# Altium PCB 9981_air_main_board_PCB.pcbdoc
Units mil, origin at the board's own origin, x right, y up, seen from the top; angles counter-clockwise.
Board outline 4807 x 4078 mil, 2 copper layers (Top Layer, Bottom Layer); 52 components, 78 nets, 246 pads, 144 vias.
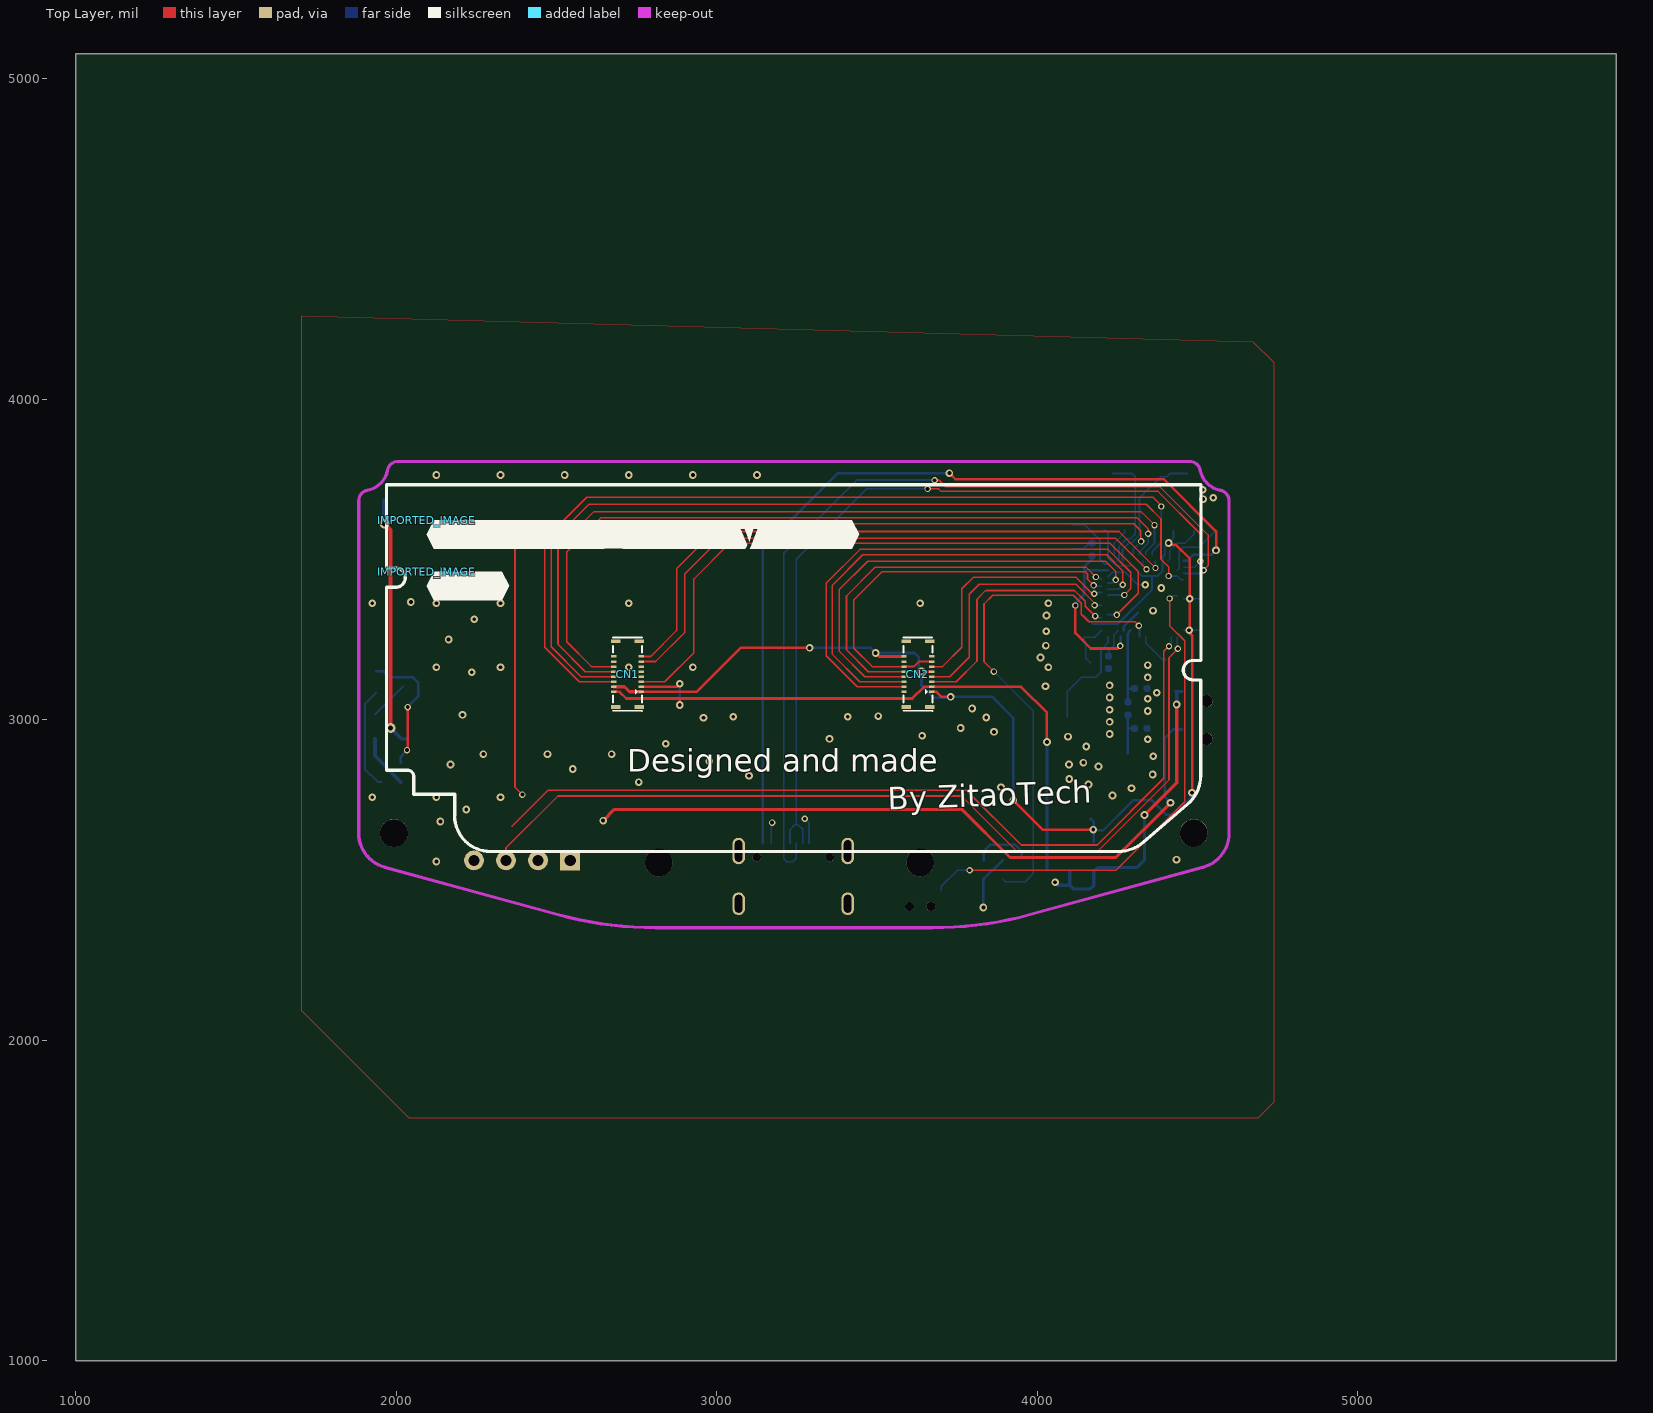
[diagram p0: Top Layer view]
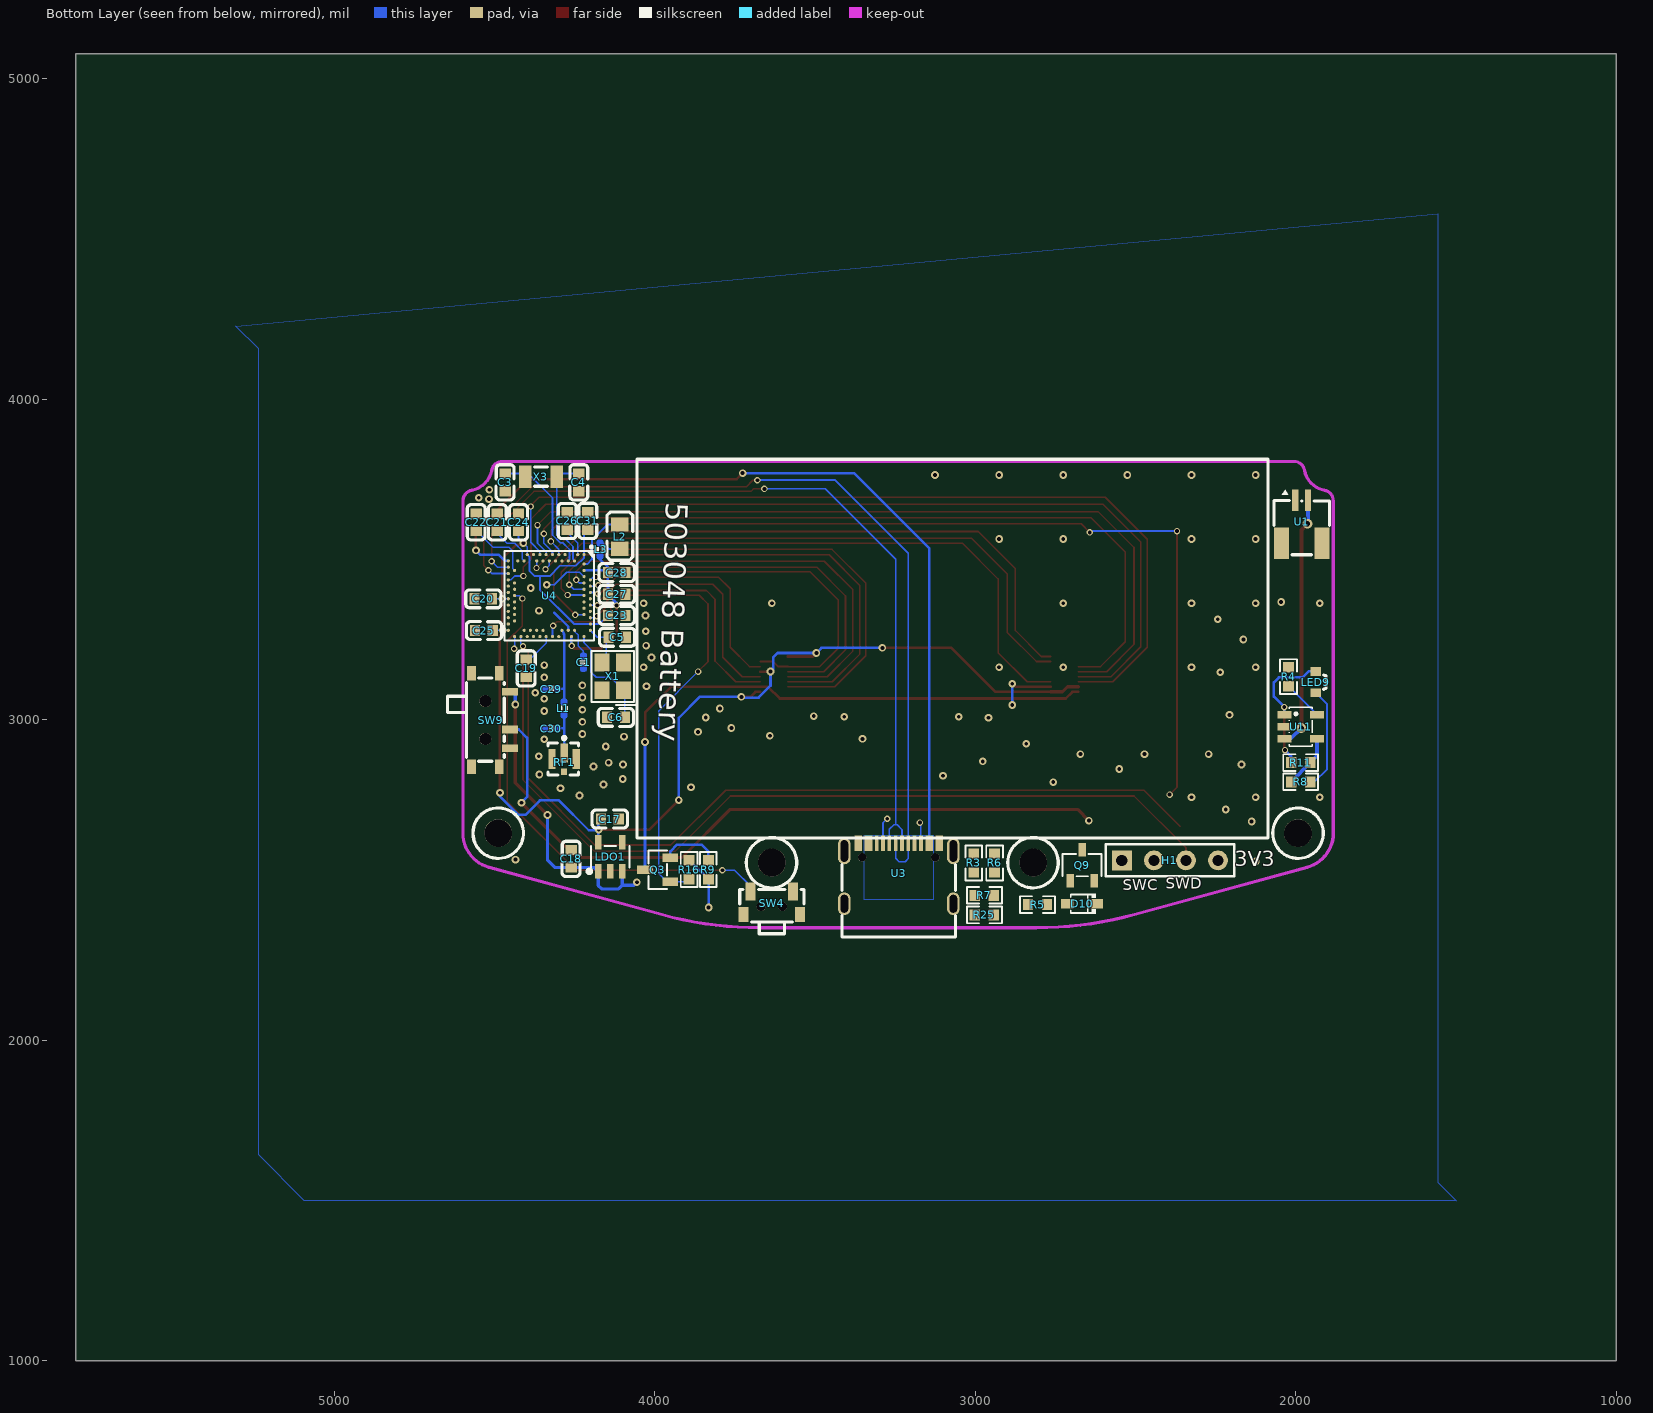
[diagram p1: Bottom Layer view, seen from below]

## Layer stack, top to bottom
Top Layer: signal copper (thickness not stored)
Dielectric: dielectric 12.6, FR-4, Dk 4.8
Bottom Layer: signal copper (thickness not stored)

## Board outline
5807,1000 1000,1000 1000,5078 5807,5078

## Components (designator, comment, footprint, x,y, rotation, side; value= is the part's Value field where it differs from the comment)
C1 "100nF" 0402电容- 4221,3178.96 r180 bottom
C3 "20pF" C0603 4467,3740 r90 bottom
C4 "20pF" C0603 4237,3740 r90 bottom
C5 "12pF" C0603 4117,3256.96 r0 bottom
C6 "12pF" C0603 4121,3006.96 r0 bottom
C17 "10uF" C0603 4140.09,2690 r0 bottom
C18 "10uF" C0603 4261,2566 r270 bottom
C19 "820pF" C0603 4401,3160 r270 bottom
C20 "4.7uF" C0603 4535,3376.96 r180 bottom
C21 "4.7uF" C0603 4491,3616 r270 bottom
C22 "4.7uF" C0603 4557,3616 r270 bottom
C23 "100nF" C0603 4119,3324.96 r180 bottom
C24 "100nF" C0603 4425,3616 r270 bottom
C25 "1uF" C0603 4533,3278 r180 bottom
C26 "100nF" C0603 4273,3620 r270 bottom
C27 "1uF" C0603 4118.39,3390.96 r0 bottom
C28 "47nF" C0603 4119,3458.96 r180 bottom
C29 "1pF" 0402电容- 4323,3094.96 r270 bottom
C30 "1pF" 0402电容- 4323,2970.96 r270 bottom
C31 "100nF" C0603 4209,3620 r90 bottom
CN1 "BM20B(0.8)-16DS-0.4V(51)" CONN-SMD_BM20B-0.8-16DS-0.4V-51 2722.13,3141.95 r90 top
CN2 "BM20B(0.8)-16DS-0.4V(51)" CONN-SMD_BM20B-0.8-16DS-0.4V-51 3627.64,3141.95 r90 top
D10 "BAT60B" SOD-323_L1.8-W1.3-LS2.5-RD 2667,2426 r180 bottom
H1 "HDR-F-2.54_1x4" HDR-F-2.54_1X4 2393,2561 r0 bottom
IMPORTED_IMAGE "IMPORTED_IMAGE" IMPORTED_IMAGE 2095.98,3622 r0 top
IMPORTED_IMAGE "IMPORTED_IMAGE" IMPORTED_IMAGE 2095.97,3462 r0 top
L1 "3.9nH" 0402电阻 4285,3034.96 r0 bottom
L2 "10uH" L0805 4109,3570.96 r90 bottom
L3 "15nH" 0402电阻 4169,3530.96 r180 bottom
LDO1 "ME6211C33M5G-N" SOT-23-5_L3.0-W1.7-P0.95-LS2.8-BL 4139,2572 r0 bottom
LED9 "TJ-S1706SW6TGLC2R-A5" LED-SMD_L1.7-W1.1-RD_RED-SIDE 1938,3117.03 r90 bottom
Q3 "AO3400A_C347475" SOT-23-3_L2.9-W1.3-P1.90-LS2.4-BR 3990.98,2532 r0 bottom
Q9 "AO3401_C727156" SOT-23-3_L2.9-W1.6-P1.90-LS2.8-BR 2667,2546 r90 bottom
R3 "2MΩ" R0603 3005,2553 r270 bottom
R4 "5.1kΩ" R0603 2023,3134 r270 bottom
R5 "10kΩ" R0603 2806,2423 r180 bottom
R6 "820kΩ" R0603 2940,2553 r270 bottom
R7 "5.1kΩ" R0603 2972,2452 r180 bottom
R8 "1kΩ" R0603 1985,2806 r0 bottom
R9 "10Ω" R0603 3832.98,2532 r90 bottom
R11 "10kΩ" R0603 1985,2866 r180 bottom
R16 "10kΩ" R0603 3893,2532 r270 bottom
R25 "5.1kΩ" R0603 2972,2391 r180 bottom
RF1 "BWIPX-4-001E" IPEX-SMD_BWIPX-4-001E 4283,2866.96 r180 bottom
SW4 "GT-TC018A-H0375-L1" SW-SMD_L4.7-W3.5-P3.35-EH 3634.97,2428.05 r180 bottom
SW9 "MSK12CO2-BDM" SW-SMD_MSK12CO2-BDM 4511.7,2998.91 r90 bottom
U1 "WAFER-SH1.0-2PWB" CONN-SMD_2P-P1.00_XUNPU_WAFER-SH1.0-2PWB 1982,3617 r0 bottom
U3 "GT-USB-7010ASV" USB-C-SMD_G-SWITCH_GT-USB-7010ASV 3238.76,2520.09 r0 bottom
U4 "NRF52840_dzt" NRF52840_DZT 4329,3390.96 r90 bottom
U11 "TP4054" SOT-23-5_L3.0-W1.7-P0.95-LS2.8-BR 1985,2978 r180 bottom
X1 "32MHz" CRYSTAL-SMD_4P-L3.2-W2.5-BL 4131,3134.96 r270 bottom
X3 "32.768kHz" FC-135R_L3.2-W1.5 4355,3758 r0 bottom

## Footprints (in the part's own frame and the unit in brackets; to place one, negate y for a bottom-side part, rotate by r counter-clockwise, add the part's x,y. Pads: shape width x height; smd on the part's side, far side on the other; paste and mask are expansions set on the pad)
0402电容- [mil]
  Top Layer region: 8,15 6.53,11.46 3,10 -7,10 -10.54,11.46 -12,15 -12,25 -10.54,28.53 -7,30 3,30 6.53,28.53 8,25
  Top Layer region: 8,-25 6.53,-28.54 3,-30 -7,-30 -10.54,-28.54 -12,-25 -12,-15 -10.54,-11.47 -7,-10 3,-10 6.53,-11.47 8,-15
  silkscreen extent -11,-7 7,7
0402电阻 [mil]
  Top Layer region: -12,-15 -10.53,-11.46 -7,-10 3,-10 6.54,-11.46 8,-15 8,-25 6.54,-28.53 3,-30 -7,-30 -10.53,-28.53 -12,-25
  Top Layer region: -12,25 -10.53,28.54 -7,30 3,30 6.54,28.54 8,25 8,15 6.54,11.47 3,10 -7,10 -10.53,11.47 -12,15
  silkscreen extent -12,-6 8,6
C0603 [mm]
  rect 0.8x0.9 smd paste+0 mask+0.051: 1(0.7,0) 2(-0.7,0)
  silkscreen extent -1.39,-0.72 1.41,0.71
CONN-SMD_2P-P1.00_XUNPU_WAFER-SH1.0-2PWB [mm]
  rect 0.5x1.7 smd paste+0 mask+0.05: 1(0.5,-1.7) 2(-0.5,-1.7)
  rect 1.2x2.5 smd paste+0 mask+0.05: 3(-1.6,1.7) 4(1.6,1.7)
  silkscreen extent -2.2,-2.54 2.2,2.6
CONN-SMD_BM20B-0.8-16DS-0.4V-51 [mm]
  rect 0.2x0.42 smd paste+0 mask+0.051: 1(-1.4,-1.09) 2(-1.4,1.09) 3(-1,-1.09) 4(-1,1.09) 5(-0.6,-1.09) 6(-0.6,1.09) 7(-0.2,-1.09) 8(-0.2,1.09) 9(0.2,-1.09) 10(0.2,1.09) 11(0.6,-1.09) 12(0.6,1.09) 13(1,-1.09) 14(1,1.09) 15(1.4,-1.09) 16(1.4,1.09)
  rect 0.3x0.75 smd paste+0 mask+0.051: 17(2.61,0.925) 18(2.61,-0.925) 19(-2.61,-0.925) 20(-2.61,0.925)
  silkscreen extent -2.91,-1.16 2.9,1.16
CRYSTAL-SMD_4P-L3.2-W2.5-BL [mm]
  rect 1.4x1.2 smd paste+0 mask+0.051: 1(1.1,0.85) 2(-1.1,0.85) 3(-1.1,-0.85) 4(1.1,-0.85)
  silkscreen extent -2.03,-1.68 2.26,1.91
FC-135R_L3.2-W1.5 [mm]
  rect 1x1.8 smd paste+0 mask+0.051: 1(1.25,0) 2(-1.25,0)
  silkscreen extent -0.51,-0.76 0.51,0.76
HDR-F-2.54_1X4 [mil]
  rect 62x62 hole 35 paste+0 mask+2: 1(150,0)
  round 62 hole 35 paste+0 mask+2: 2(50,0) 3(-50,0) 4(-150,0)
  silkscreen extent -200,-50 200,50
IMPORTED_IMAGE [mil]
  silkscreen extent 0,-89 1348,0
IPEX-SMD_BWIPX-4-001E [mm]
  rect 0.6x1.5 smd paste+0 mask+0.051: 1(0,0.738)
  rect 0.58x1.58 smd paste+0 mask+0.051: 2(-0.96,0.263) 3(0.96,0.263)
  rect 0.5x0.5 smd paste+0 mask+0.051: 4(0,-0.737)
  silkscreen extent -1.27,-1.01 1.14,2.05
L0805 [mil]
  rect 44.59x54.21 smd paste-3937.01 mask+2: 1(38.05,0) 2(-38.04,0)
  silkscreen extent -73,-40 77,40
LED-SMD_L1.7-W1.1-RD_RED-SIDE [mm]
  rect 0.7x0.8 smd paste+0 mask+0.051: 1(0.847,0) 2(-0.847,0)
  silkscreen extent -0.56,-0.8 0.57,-0.63
NRF52840_DZT [mm]
  round 0.25 smd paste-100 mask+0.051: A8(1.148,-3.25) A10(0.648,-3.25) A12(0.148,-3.25) A14(-0.352,-3.25) A16(-0.852,-3.25) A18(-1.352,-3.25) A20(-1.852,-3.25) A22(-2.352,-3.25) A23(-2.852,-3.25) AA24(-3.352,2.25) AB2(2.648,2.5) AC5(1.898,2.75) AC9(0.898,2.75) AC11(0.398,2.75) AC13(-0.102,2.75) AC15(-0.602,2.75) AC17(-1.102,2.75) AC19(-1.602,2.75) AC21(-2.102,2.75) AC24(-3.352,2.75) AD2(2.648,3.25) AD4(2.148,3.25) AD6(1.648,3.25) AD8(1.148,3.25) AD10(0.648,3.25) AD12(0.148,3.25) AD14(-0.352,3.25) AD16(-0.852,3.25) AD18(-1.352,3.25) AD20(-1.852,3.25) AD22(-2.352,3.25) AD23(-2.852,3.25) B1(3.148,-2.75) B3(2.398,-2.75) B5(1.898,-2.75) B7(1.398,-2.75) B9(0.898,-2.75) B11(0.398,-2.75) B13(-0.102,-2.75) B15(-0.602,-2.75) B17(-1.102,-2.75) B19(-1.602,-2.75) B24(-3.352,-2.75) C1(3.148,-2.25) D2(2.648,-2) D23(-2.852,-2) E24(-3.352,-1.75) F2(2.648,-1.5) F23(-2.852,-1.5) G1(3.148,-1.25) H2(2.648,-1) H23(-2.852,-1) J1(3.148,-0.75) J24(-3.352,-0.75) K2(2.648,-0.5) L1(3.148,-0.25) L24(-3.352,-0.25) M2(2.648,0) N1(3.148,0.25) N24(-3.352,0.25) P2(2.648,0.5) P23(-2.852,0.5) R1(3.148,0.75) R24(-3.352,0.75) T2(2.648,1) T23(-2.852,1) U1(3.148,1.25) U24(-3.352,1.25) V23(-2.852,1.5) W1(3.148,1.75) W24(-3.352,1.75) Y2(2.648,2) Y23(-2.852,2)
  silkscreen extent -3.65,-3.55 3.85,3.55
R0603 [mil]
  rect 31.75x34.02 smd paste-3937.01 mask+2: 1(29.65,0) 2(-29.66,0)
  silkscreen extent -55,-26 55,26
SOD-323_L1.8-W1.3-LS2.5-RD [mm]
  rect 1x0.75 smd paste+0 mask+0.051: 1(1.173,0) 2(-1.173,0)
  silkscreen extent -0.9,-0.8 1.08,0.8
SOT-23-3_L2.9-W1.3-P1.90-LS2.4-BR [mm]
  rect 1.25x0.7 smd paste+0 mask+0.051: 1(-1,0.95) 2(-1,-0.95) 3(1,0)
  silkscreen extent -0.73,-1.53 0.73,1.53
SOT-23-3_L2.9-W1.6-P1.90-LS2.8-BR [mm]
  rect 1.07x0.6 smd paste+0 mask+0.051: 1(-1.235,0.95) 2(-1.235,-0.95) 3(1.235,0)
  silkscreen extent -0.88,-1.54 0.88,1.54
SOT-23-5_L3.0-W1.7-P0.95-LS2.8-BL [mm]
  rect 0.49x1.157 smd paste+0 mask+0.051: 1(0.95,1.154) 2(0,1.154) 3(-0.95,1.154)
  rect 0.49x1.175 smd paste+0 mask+0.051: 4(-0.95,-1.154) 5(0.95,-1.154)
  silkscreen extent -1.53,-0.85 1.8,1.29
SOT-23-5_L3.0-W1.7-P0.95-LS2.8-BR [mm]
  rect 1.1x0.6 smd paste+0 mask+0.051: 1(-1.3,0.95) 2(-1.3,0) 3(-1.3,-0.95) 4(1.3,-0.95) 5(1.3,0.95)
  silkscreen extent -0.9,-1.55 0.9,1.55
SW-SMD_L4.7-W3.5-P3.35-EH [mm]
  rect 0.8x1.4 smd paste+0 mask+0.051: 1(1.675,0.918) 2(-1.675,0.918)
  rect 0.8x1.2 smd paste+0 mask+0.051: 3(2.25,-0.917) 4(-2.25,-0.917)
  round 0.7 hole 0.7 unplated paste+0: ""(-0.85,-0.282) ""(0.85,-0.282)
  silkscreen extent -2.54,-2.43 2.54,1.07
SW-SMD_MSK12CO2-BDM [mm]
  rect 0.6x1.3 smd paste+0 mask+0.051: 1(-2.25,-1.525) 2(-0.75,-1.525) 3(2.25,-1.525)
  rect 1.15x0.7 smd paste+0 mask+0.051: 4(-3.7,1.525) 4(-3.7,-0.675) 4(3.7,-0.675) 4(3.7,1.525)
  round 0.95 hole 0.95 unplated paste+0: ""(-1.5,0.425) ""(1.5,0.425)
  silkscreen extent -3.27,-1.08 3.33,3.42
USB-C-SMD_G-SWITCH_GT-USB-7010ASV [mm]
  oval 1x2.1 hole 0.6 slot 1.7 at 90 deg paste+0 mask+0.05: 1(4.32,-1.78) 2(-4.32,-1.78)
  oval 1x1.8 hole 0.6 slot 1.4 at 90 deg paste+0 mask+0.05: 3(-4.32,2.4) 4(4.32,2.4)
  rect 0.6x1.24 smd paste-100 mask+0.05: A1B12(3.2,-2.4) A4B9(2.4,-2.4) B1A12(-3.2,-2.4) B4A9(-2.4,-2.4)
  rect 0.3x1.24 smd paste-100 mask+0.05: A5(1.25,-2.4) A6(0.25,-2.4) A7(-0.25,-2.4) A8(-1.25,-2.4) B5(-1.75,-2.4) B6(-0.75,-2.4) B7(0.75,-2.4) B8(1.75,-2.4)
  round 0.65 hole 0.65 unplated paste+0: ""(-2.89,-1.28) ""(2.9,-1.28)
  silkscreen extent -4.5,-0.69 4.5,5.03

## Free pads (board coordinates)
  round 86.61 hole 86.61 unplated paste+0: ""(1993.24,2646) ""(1993.24,2646) ""(2819.14,2554.03) ""(3634.97,2554.03) ""(4488.39,2645.99) ""(4488.39,2646)

## Via types
v1: diameter 24, hole 12, Top Layer to Bottom Layer, tented both sides, 107 vias
v2: diameter 20, hole 12, Top Layer to Bottom Layer, tented both sides, 35 vias
v3: diameter 30, hole 16, Top Layer to Bottom Layer, tented both sides, 2 vias

## Nets (pads, with @x,y where several pads share a name; then routed paths per layer and width w, separated by ;. In a path a pad name is that pad's centre, name@x,y a point inside that pad or via, vN(x,y) a via of type N, cw(c..) or ccw(c..) an arc to the next point about the centre after c; other vN are vias at no path point)
1V8: CN1.9
2V8: CN1.11
AI2: R3.2 R6.1 U4.J1 | length 3315.7
  Top Layer w5: v2(2371,3588) 2371,2789 v2(2394,2766) ; v2(2643,3584) 2670,3611 4301,3611 ; 3946,3611 4301,3611 ; v2@4324,3554 v2(4324,3556) ; v2@4328,3555 4327,3556 v2(4324,3556) ; 4301,3611 4323,3589 ; 4301,3611 4323,3589 ; v2@4323,3557 v2(4324,3556) ; v2@4323,3557 4323,3589 ; v2@4323,3557 4323,3589 ; v2@4323,3557 v2(4324,3556)
  Bottom Layer w5: U4.J1 4299.47,3531.47 v2(4324,3556)
  Bottom Layer w6: v2(2371,3588) 2640,3588 v2@2643,3585
AI3: U4.K2
CN2_2: CN2.2
COL0: CN1.10 U4.N1 | length 2538.8
  Top Layer w5: CN1.10 2590.18,3149.82 2505,3235 2505,3537 2616,3648 4325,3648 v2(4366,3607)
  Bottom Layer w5: U4.N1 4338.8,3522.8 4366,3550 v2(4366,3607)
COL1: CN1.8 U4.AD8 | length 3114.4
  Top Layer w5: CN1.8 2576.93,3134.07 2484,3227 2484,3554 2602,3672 3905,3672 ; 4249,3672 3905,3672 ; v2(4410,3448) 4410,3476 4386,3500 4386,3626 4340,3672 3905,3672
  Bottom Layer w5: v2(4410,3448) 4437,3448 4448.83,3436.17 U4.AD8
COL2: CN1.6 U4.R1 | length 2749.7
  Top Layer w5: CN1.6 2571.7,3118.3 2464,3226 2464,3563 2595,3694 4361,3694 4387,3668 v2(4387,3665)
  Bottom Layer w5: U4.R1 4358.53,3524.53 4387,3553 v2(4387,3665)
COL3: CN1.15 U4.T2 | length 1948.2
  Top Layer w5: CN1.15 2794.07,3197.07 2875,3278 2875,3471 2991,3587 4255,3587 v2(4369,3473)
  Bottom Layer w5: U4.T2 4368.37,3473.63 v2(4369,3473)
COL4: CN1.5 U4.B19 | length 2090.4
  Top Layer w5: CN1.5 2838.3,3118.3 2929,3209 2929,3439 3040,3550 4227,3550 4315,3462 4315,3394 v2(4248,3327)
  Bottom Layer w5: U4.B19 4221.6,3327 v2(4248,3327)
COL5: CN2.12 CN2.13 U4.A10 | length 1261.6
  Top Layer w5: CN2.12 3485.43,3165.57 3428,3223 3428,3373 3517,3462 4150,3462 4157,3455 4157,3438 v2(4176,3419)
  Top Layer w6: CN2.12 3614.57,3165.57 3630.32,3181.32 CN2.13
  Bottom Layer w5: v2(4176,3419) 4178.51,3416.49 U4.A10
COL6: CN2.10 U4.A8 | length 1225.8
  Top Layer w5: CN2.10 3473.18,3149.82 3405,3218 3405,3386 3495,3476 4152,3476 v2(4183,3445)
  Bottom Layer w5: v2(4183,3445) 4192.22,3445 U4.A8
COL7: CN2.8 U4.B9 | length 1394.2
  Top Layer w5: CN2.8 3461.93,3134.07 3382,3214 3382,3405 3471,3494 4213,3494 4245,3462 v2(4245,3436)
  Bottom Layer w5: U4.B9 4235.33,3426.33 v2(4245,3436)
COL8: CN2.6 U4.B11 | length 1536.3
  Top Layer w5: CN2.6 3446.7,3118.3 3360,3205 3360,3418 3456,3514 4217,3514 4267,3464 v2(4267,3421)
  Bottom Layer w5: U4.B11 4252.64,3406.64 v2(4267,3421)
COL9: CN2.4 U4.B13 | length 1663.9
  Top Layer w5: CN2.4 3438.4,3102.6 3342,3199 3342,3426 3447,3531 4221,3531 4292,3460 4292,3409 v2(4272,3389)
  Bottom Layer w5: U4.B13 4222.77,3389 v2(4272,3389)
DCC: L2.1 U4.B3 | length 197.5
  Bottom Layer w6: L2.1 4146,3609 4196,3559 4196,3500 4210.62,3485.38 U4.B3
DCCH: U4.AB2
DEC2: U4.A18
DEC6: C27.1 C28.2 U4.B5 U4.E24 | length 531.8
  Top Layer w8: v2(4119,3356) 4119,3270 4167,3222 4251,3222 v2(4259,3230)
  Bottom Layer w8: v2(4119,3356) 4119,3364.01 C27.1 ; C27.1 C28.2 ; 4171,3511 4171,3500 4146.6,3475.6 C28.2 ; U4.B5 4153.3,3465.7 C28.2 ; v2(4259,3230) 4260.1,3231.1 U4.E24
DECUSB: C22.1 U4.AC5 | length 202.5
  Bottom Layer w5: U4.AC5 4443,3471.4 4443,3526 4455,3538 4505,3538 4555.44,3588.44 C22.1
EXTERN_5V: D10.2 Q9.1 R5.1 R8.1 R11.1 U3.A4B9 U3.B4A9 U4.AD2 U11.4 | length 3696.7
  Top Layer w8: v1(3726,3769) 3745,3750 4395,3750 ; 3836,3750 4395,3750 ; 4395,3750 4558,3587 ; 4395,3750 4558,3587 ; 4558,3587 v1(4558,3528) 4558,3587
  Bottom Layer w8: U3.B4A9 3144.3,3535.3 3378,3769 v1(3726,3769) ; U4.AD2 4467.23,3495.23 4487,3515 4545,3515 v1(4558,3528)
  Bottom Layer w12: U11.4 1933.81,2887.53 R11.1 ; R11.1 R8.1
GND: C3.2 C4.2 C5.2 C6.1 C17.2 C18.2 C19.1 C20.2 C21.2 C22.2 C23.1 C24.2 C25.2 C26.2 C27.2 C28.1 C31.1 CN1.7 CN1.17 CN1.18 CN1.19 CN1.20 CN2.17 CN2.18 CN2.19 CN2.20 H1.1 LDO1.2 R3.1 R4.2 R5.2 R7.1 R9.2 R16.2 R25.1 RF1.2 RF1.3 RF1.4 SW4.1 U1.1 U1.3 U1.4 U3.1 U3.2 U3.3 U3.4 U3.A1B12 U3.B1A12 U4.B7 U4.F23 U11.2 X1.2 X1.4 | length 445
  Bottom Layer w5: v1(4337,3421) 4314,3421 4275,3460 ; 4234.72,3460 U4.B7 4234.72,3460 ; 4234.72,3460 4275,3460 ; 4234.72,3460 4275,3460
  Bottom Layer w8: v1(3832,2414) 3832,2501.36 R9.2 ; R9.2 R16.2 ; U4.F23@4269.95,3278.69 4269.95,3289.95 4314,3334
  other v1: 2125.7,2557.8 4434.73,2563.3 2138,2682 2219,2720 1925.7,2757.8 2125.7,2757.8 2325.7,2757.8 4234.73,2763.3 4294,2786 3887,2789 4160,2798 2757,2805 4100,2815 3101,2825 4360,2829 2551,2846 4191,2854 2170,2860 4099,2860 4144,2866 2977,2870 4362,2886 2272.3,2892.4 2472.3,2892.4 2672.3,2892.4 4153,2916 2841,2925 4345,2939 3352,2940 4096,2947 3641,2950 4226,2955 3865,2962 3761,2974 4226,2993 2959,3006 3841,3007 3052,3009 3409,3009 3504,3011 2207,3015 4345,3027 4226,3031 3797,3035 4345,3065 4226,3069 4373,3084 4026,3104 4226,3107 4345,3132 2236,3148 2125.7,3163.3 2325.7,3163.3 2725.7,3163.3 2925.7,3163.3 4034.73,3163.3 4345,3170 4010,3194 4027,3231 2164,3250 4028,3276 2244,3313 4029,3325 4361,3340 1925.7,3363.3 2125.7,3363.3 2325.7,3363.3 2725.7,3363.3 3634.73,3363.3 4034.73,3363.3 2046,3367 4387,3411 2125.7,3563.3 2325.7,3563.3 2725.7,3563.3 2925.7,3563.3 4517,3688 4549,3692 4516,3717 2125.7,3763.3 2325.7,3763.3 2525.7,3763.3 2725.7,3763.3 2925.7,3763.3 3125.7,3763.3
KEYB2: CN2.11 U4.A12 | length 775.2
  Top Layer w5: CN2.11@3670.5,3165.6 3704.6,3165.6 3765,3226 3765,3408 3801,3444 4121,3444 4172,3393 v2(4178,3393)
  Bottom Layer w5: v2(4178,3393) 4181.8,3396.8 U4.A12
L1_1: RF1.1 | length 139
  Bottom Layer w8: RF1.1 4283,3014.96 ; 4283,2972.96 4303,2972.96
L3_1: L2.2 | length 69.5
  Bottom Layer w6: L2.2 4143.9,3532.9 4162,3551 4171,3551
LEDB_+: C17.1 C20.1 C23.2 C24.1 C25.1 C31.2 CN1.1 CN1.4 CN2.1 CN2.9 CN2.16 LDO1.5 U4.A22 U4.AD14 U4.AD23 U4.B1 U4.W1 | length 4322
  Top Layer w8: CN1.1 2937.8,3086.8 3075,3224 v1(3290,3224) ; v1(3496,3208) 3506.94,3197.06 CN2.16 ; v1(3639,3150) CN2.9@3670.5,3149.8 ; CN2.1 3686.17,3086.83 3702,3071 v1(3730,3071) ; v1(3925,2749) 4017,2657 v1(4175,2657) ; v1(4410,3551) 4415,3546 4432,3546 4476,3502 v1(4476,3377) 4476,3281 v1(4474,3279) 4474,3272 4483,3263 v1(4483,2772)
  Top Layer w10: CN1.4 2712.42,3102.58 2728.17,3086.83 CN1.1
  Bottom Layer w5: C23.2 4173.14,3298.38 U4.A22 ; C31.2 4220.73,3580.71 U4.B1 ; U4.W1 4397.9,3538.9 4425,3566 C24.1@4425,3588.5 ; U4.AD23 4457.26,3279 v1(4474,3279) 4504.44,3279 C25.1 ; U4.AD14 4457.1,3377 v1(4476,3377) C20.1
  Bottom Layer w6: U4.A22@4201.1,3298.4 4251.4,3298.4 4358.6,3405 4358.6,3448 ; U4.B1 4220.73,3505.27 4246,3480 4296,3480 4328,3448 4374,3448 4391,3465 4391,3508.01 U4.W1
  Bottom Layer w8: v1(3290,3224) 3480,3224 v1(3496,3208) 3617,3208 3631,3194 3631,3158 v1(3639,3150) 3639,3106 3676,3069 3728,3069 v1(3730,3071) 3860,3071 3925,3006 v1(3925,2749) ; C17.1 4176.4,2681.25 LDO1.5 ; v1(4175,2657) 4177,2655 4206,2655 4299,2748 4358,2748 4403,2703 4425,2703 4483,2761 v1(4483,2772)
LEDB_D: CN1.2 CN1.3 CN2.3 Q3.3 | length 2107.9
  Top Layer w8: CN1.2 2697.17,3086.83 2718,3066 3610,3066 3646.58,3102.58 CN2.3 3949.42,3102.58 4030.35,3021.65 v1(4030.35,2930) ; CN1.3 2875.58,3102.58 v1(2885,3112) ; v1(2885,3046) 2885,3066
  Bottom Layer w8: v1(2885,3046) v1(2885,3112)
  Bottom Layer w10: Q3.3 v1(4030.35,2930)
P0.09: Q3.1 R16.1 U4.L24 | length 1601.9
  Top Layer w5: v2(3865,3150) 3834,3181 3834,3361 3861,3388 4112,3388 4137,3363 4137,3329 4161,3305 4305,3305 v2(4317,3293)
  Bottom Layer w5: v2(3865,3150) 3988,3027 3988,2520 3962.6,2494.6 Q3.1 3900.74,2494.6 R16.1 ; v2(4317,3293) 4319.16,3290.84 U4.L24
P0.10: U4.J24
P0.12: U4.U1
P0.15: U4.AD10
P0.17: U4.AD12
P0.20: U4.AD16
P0.22: U4.AD18
P0.24: U4.AD20
P0.26: U4.G1
P1.00: U4.AD22
P1.02: U4.W24
P1.04: U4.U24
P1.06: U4.R24
R4_1: R4.1 U11.5 | length 125.9
  Bottom Layer w6: U11.5 R4.1
R7_2: R7.2 U3.A5 | length 81.8
  Bottom Layer w5: v2(3275,2691) 3287.97,2678.03 U3.A5
R8_2: LED9.2 R8.2 | length 321.1
  Bottom Layer w6: LED9.2 1903,3048.7 1903,2846 1943,2806 R8.2
R9_1: Q3.2 R9.1 | length 183.2
  Bottom Layer w8: R9.1 3832.98,2588.98 3854,2610 3931,2610 3951.61,2589.39 Q3.2
R11_2: LED9.1 R11.2 U11.1 | length 441.8
  Top Layer w8: v2(2034,2905) 2034.4,2905 2036.2,2906.8 v2(2036.2,3039.2)
  Bottom Layer w8: LED9.1 1960.6,3150.4 1979,3132 2053,3132 2069,3116 2069,3072 v2(2036.2,3039.2) U11.1 ; R11.2 2014.66,2885.66 v2(2034,2905)
R25_2: R25.2 U3.B5 | length 65.7
  Bottom Layer w5: U3.B5 3169.86,2675.86 v2(3173,2679)
RESET: SW4.2 U4.AC13 | length 1562.7
  Top Layer w5: v2(3789,2530) 4246,2530 4460,2744 4460,3246 4413,3293 v2(4413,3378)
  Bottom Layer w5: SW4.2@3700.9,2467.1 3700.9,2479.9 3751,2530 v2(3789,2530) ; v2(4413,3378) 4421.96,3386.96 U4.AC13
ROW0: CN2.5 U4.A20 | length 805.5
  Top Layer w5: CN2.5 3747.32,3118.32 3812,3183 3812,3376 3839,3403 4116,3403 4150,3369 4150,3354 v2(4181,3323)
  Bottom Layer w5: v2(4181,3323) 4185.9,3318.1 U4.A20@4201.1,3318.1
ROW1: CN1.12 U4.L1 | length 2423.3
  Top Layer w5: CN1.12 2609.43,3165.57 2532,3243 2532,3523 2639,3630 4311,3630 4346,3595 v2(4346,3580)
  Bottom Layer w5: U4.L1 4319.2,3524.2 4346,3551 v2(4346,3580)
ROW2: CN1.13 U4.M2 | length 1913.3
  Top Layer w5: CN1.13 2809.3,3181.3 2901,3273 2901,3455 3012,3566 4244,3566 v2(4341,3469)
  Bottom Layer w5: U4.M2 4329,3481 v2(4341,3469)
ROW3: CN2.7 U4.A16 | length 795.8
  Top Layer w5: CN2.7@3670.5,3134.1 3727.1,3134.1 3788,3195 3788,3391 3819,3422 4121,3422 4179,3364 v2(4179,3357)
  Bottom Layer w5: v2(4179,3357) 4179.43,3357.43 U4.A16@4201.05,3357.43
S$8205: 
S$8209: 
S$8213: 
S$8217: 
S$48758: 
S$52734: 
S$96078: 
SWC: H1.2 U4.AA24 | length 2689.2
  Top Layer w5: 2361,2667 2474,2780 3779,2780 3950,2609 4187,2609 4395,2817 4395,3213 v2(4411,3229)
  Bottom Layer w5: v2(4411,3229) 4417.58,3235.58 U4.AA24
SWD: H1.3 U4.AC24 | length 2797.5
  Top Layer w5: H1.3 2343,2600 2505,2762 3764,2762 3937,2589 4187.99,2589 4411,2812 4411,3193 v2(4439,3221)
  Bottom Layer w5: U4.AC24 4437.27,3222.73 v2(4439,3221)
TP_MOTION2_1V8: CN2.15
TP_SCL_1V8: CN1.16
TP_SDA_1V8: CN1.14
TPBLK_LEDK2: CN2.14
U4_C1: C26.1 U4.C1 | length 91
  Bottom Layer w5: U4.C1 4240.4,3551.4 4273,3584 C26.1
U4_D23: U4.D23 | length 91
  Bottom Layer w5: 4223,3199 4223,3214 4239,3230 4239,3264 4250.3,3275.3 U4.D23
U4_H23: U4.H23 | length 237.5
  Bottom Layer w8: 4283,3062.96 4283,3262.66 ; 4283,3096.96 4303,3096.96 ; 4283,3262.68 cw(c4305.64,3262.68) U4.H23
U4_N24: C19.2 U4.N24 | length 103.4
  Bottom Layer w5: U4.N24 4338.8,3239.2 4390.4,3187.6 C19.2
USB_D+: U3.A6 U3.B6 U4.AD6 | length 2718.3
  Top Layer w5: v2(3680,3747) 3694,3747 3715,3726 4383,3726 4533,3576 4533,3480 v2(4519,3466)
  Bottom Layer w5: U3.B6 3209.2,2566.8 3219,2557 3238,2557 3248.6,2567.6 U3.A6 ; U4.AD6 4508.86,3455.86 v2(4519,3466)
  Bottom Layer w6: U3.B6 3209.23,3519.23 3437,3747 v2(3680,3747)
USB_D-: U3.A7 U3.B7 U4.AD4 | length 2520.8
  Top Layer w5: v2(3658,3720) 3692,3720 3700,3712 4377,3712 4509,3580 v2(4509,3494)
  Bottom Layer w5: U3.A7 3228.9,2656.9 3244,2672 3254,2672 3268.3,2657.7 U3.B7 ; 3247.99,2672 3247.99,3500 3468,3720 v2(3658,3720) ; U4.AD4 4490.54,3475.54 v2(4509,3494)
VBAT: Q9.3 R6.2 U1.2 U11.3 | length 785.5
  Top Layer w12: v3(1964,3611) 1983,3592 v3(1983,2974)
  Bottom Layer w12: U1.2 1962.31,3612.69 v3(1964,3611) ; v3(1983,2974) 2016.4,2940.6 U11.3
VDDH: C21.1 U4.Y2 | length 141
  Bottom Layer w5: U4.Y2 4413,3500.5 4413,3526 4437,3550 4461,3550 4489,3578 C21.1@4489,3588.5
VSYS: D10.1 Q9.2 SW9.2 | length 2191.5
  Top Layer w10: v1(2646,2685) 2681,2720 3765,2720 3915,2570 4245,2570 v1(4416,2741)
  Bottom Layer w8: v1(4416,2741) 4398,2759 4398,2943 4424.39,2969.39 SW9.2
VSYS_IN: C18.1 H1.4 LDO1.1 LDO1.3 SW9.3 | length 982
  Top Layer w10: v1(4334.85,2702.84) 4435,2803 v1(4435,3047)
  Bottom Layer w10: v1(4056,2493) 4065.6,2483.4 4101.6,2483.4 ; LDO1.3 4101.6,2483.4 ; C18.1 4310.4,2538.4 4335,2563 v1(4334.85,2702.84) ; C18.1 4188.26,2538.44 LDO1.1 4176.4,2482.4 4166,2472 4113,2472 4101.6,2483.4 ; v1(4435,3047) 4435,3084 4431.5,3087.5 SW9.3
XC1: C6.2 U4.B24 X1.1 | length 331.2
  Bottom Layer w5: C6.2 4093.44,3087.55 4097.54,3091.65 4137.89,3132 4183,3132 4199,3148 4199,3218 4220.73,3239.73 U4.B24
XC2: C5.1 U4.A23 X1.3 | length 152.5
  Bottom Layer w5: C5.1 4179.32,3256.96 U4.A23 ; C5.1 4144.6,3250.4 4151,3244 4151,3191.7 X1.3
XL1: C4.1 U4.D2 X3.2 | length 365.6
  Bottom Layer w5: U4.D2 4255,3499.97 4255,3540 4279,3564 4291,3564 4305.8,3578.8 X3.2
  Bottom Layer w6: C4.1 4296.23,3767.56 X3.2
XL2: C3.1 U4.F2 X3.1 | length 404.3
  Bottom Layer w5: U4.F2@4269.95,3495.23 4266,3499.18 4266,3531 4287,3552 4295,3552 4319,3576 4319,3692 4385,3758 X3.1
  Bottom Layer w6: X3.1 4413.77,3767.56 C3.1
pads on no net: LDO1.4 SW4. SW4.3 SW4.4 SW9. SW9.1 SW9.4 U3. U3.A8 U3.B8 U4.A14 U4.AC9 U4.AC11 U4.AC15 U4.AC17 U4.AC19 U4.AC21 U4.B15 U4.B17 U4.H2 U4.P2 U4.P23 U4.T23 U4.V23 U4.Y23

## Polygon pours and split planes (outlines as drawn)
GND on Top Layer (solid): 1704,4258 1704,2093 2039,1758 4689,1758 4739,1808 4739,4113 4674,4178
EXTERN_5V on Bottom Layer (solid): 3131,2640 3131,2438 3347,2438 3347,2640
GND on Bottom Layer (solid): 1557,4578 1557,1557 1500,1500 5093,1500 5236,1643 5236,4157 5307,4228

## Keep-outs
Keep-Out Layer:
  lines w10: 1883,2646 ccw(c1993.24,2646) 1964.12,2539.68 ; 1883.5,2646.03 ccw(c1993.27,2646.03) 1964.28,2540.16 ; 1883.5,3683.19 cw(c1916.57,3683.19) 1910.78,3715.75 ccw(c1897.28,3791.72) 1973.25,3778.22 cw(c2005.81,3772.43) 2005.81,3805.5 ; 2503.83,2391.86 ccw(c2809.2,3506.81) 2809.2,2350.8 ; 2503.93,2392.35 ccw(c2809.21,3506.97) 2809.21,2351.3 ; 3672.43,2350.8 ccw(c3672.43,3506.81) 3977.8,2391.86 ; 4475.82,3805.5 cw(c4475.82,3772.43) 4508.38,3778.22 ccw(c4584.35,3791.72) 4570.85,3715.74 cw(c4565.06,3683.18) 4598.13,3683.18 ; 4517.51,2539.68 ccw(c4488.39,2646) 4598.63,2646

## Other copper
Top Layer:
  pour cut-out: 4239,3206.96 4319.16,3206.96 4319.16,2925.12 4319,2924.96 4259,2924.96 4239,2924.96
Bottom Layer:
  pour cut-out: 4239,3206.96 4319.16,3206.96 4319.16,2925.12 4319,2924.96 4259,2924.96 4239,2924.96

## Silkscreen, mask and mechanical layers (free items; w line width, h text height)
Top Overlay:
  lines w10: 1970.4,3473.51 1998.27,3473.51 cw(c1998.27,3443.14) 1998.27,3412.77 1970.4,3412.77 1970.4,2842.23 2035.56,2842.23 cw(c2035.56,2822.52) 2055.27,2822.52 2055.27,2767.38 2182.68,2767.38 ; 1970.4,3732.49 4511.27,3732.49 4511.27,3184.88 4486.24,3184.88 ccw(c4486.06,3154.51) 4486.23,3124.14 4510.06,3124.14 4510.06,2825.72 cw(c4391.94,2825.72) 4468.92,2736.14 4330.66,2617.33 cw(c4253.68,2706.91) 4253.68,2588.8 2293.93,2588.8
  lines w10 net S$48758: 2182.67,2700.05 ccw(c2293.93,2700.05) 2293.93,2588.8 ; 2182.68,2700.05 2182.68,2767.38
  lines w10 net S$52734: 1970.4,3473.51 1970.4,3732.49
  text "Designed and made" at 2721,2814 h120
  text "By ZitaoTech" at 3536,2696 h120 r2
Bottom Overlay:
  circle w10: c1993.24,2646 r78.74
  circle w10: c4488.39,2645.99 r78.74
  circle w10: c3636,2553.94 r78.74
  circle w10: c2820.17,2553.94 r78.74
  lines w10 net S$8205: 2087,2631.27 2087,3812.37
  lines w10 net S$8209: 2087,2631.27 4055.5,2631.27
  lines w10 net S$8213: 2087,3812.37 4055.5,3812.37
  lines w10 net S$8217: 4055.5,2631.27 4055.5,3812.37
  text "503048 Battery" at 3987,3680.01 h118.11 r92
  text "3V3" at 2191,2527.01 h80
  text "SWD" at 2405.26,2459.66 h59.05
  text "SWC" at 2540.39,2455.99 h59.05
Document:
  lines w10: 3240.82,1822.3 3240.83,3863.09